# Altium PCB C8T6.PcbDoc
Units mil, origin at the board's own origin, x right, y up, seen from the top; angles counter-clockwise.
Board outline 1420 x 1527.01 mil, 2 copper layers (Top Layer, Bottom Layer); 23 components, 22 nets, 120 pads, 26 vias.
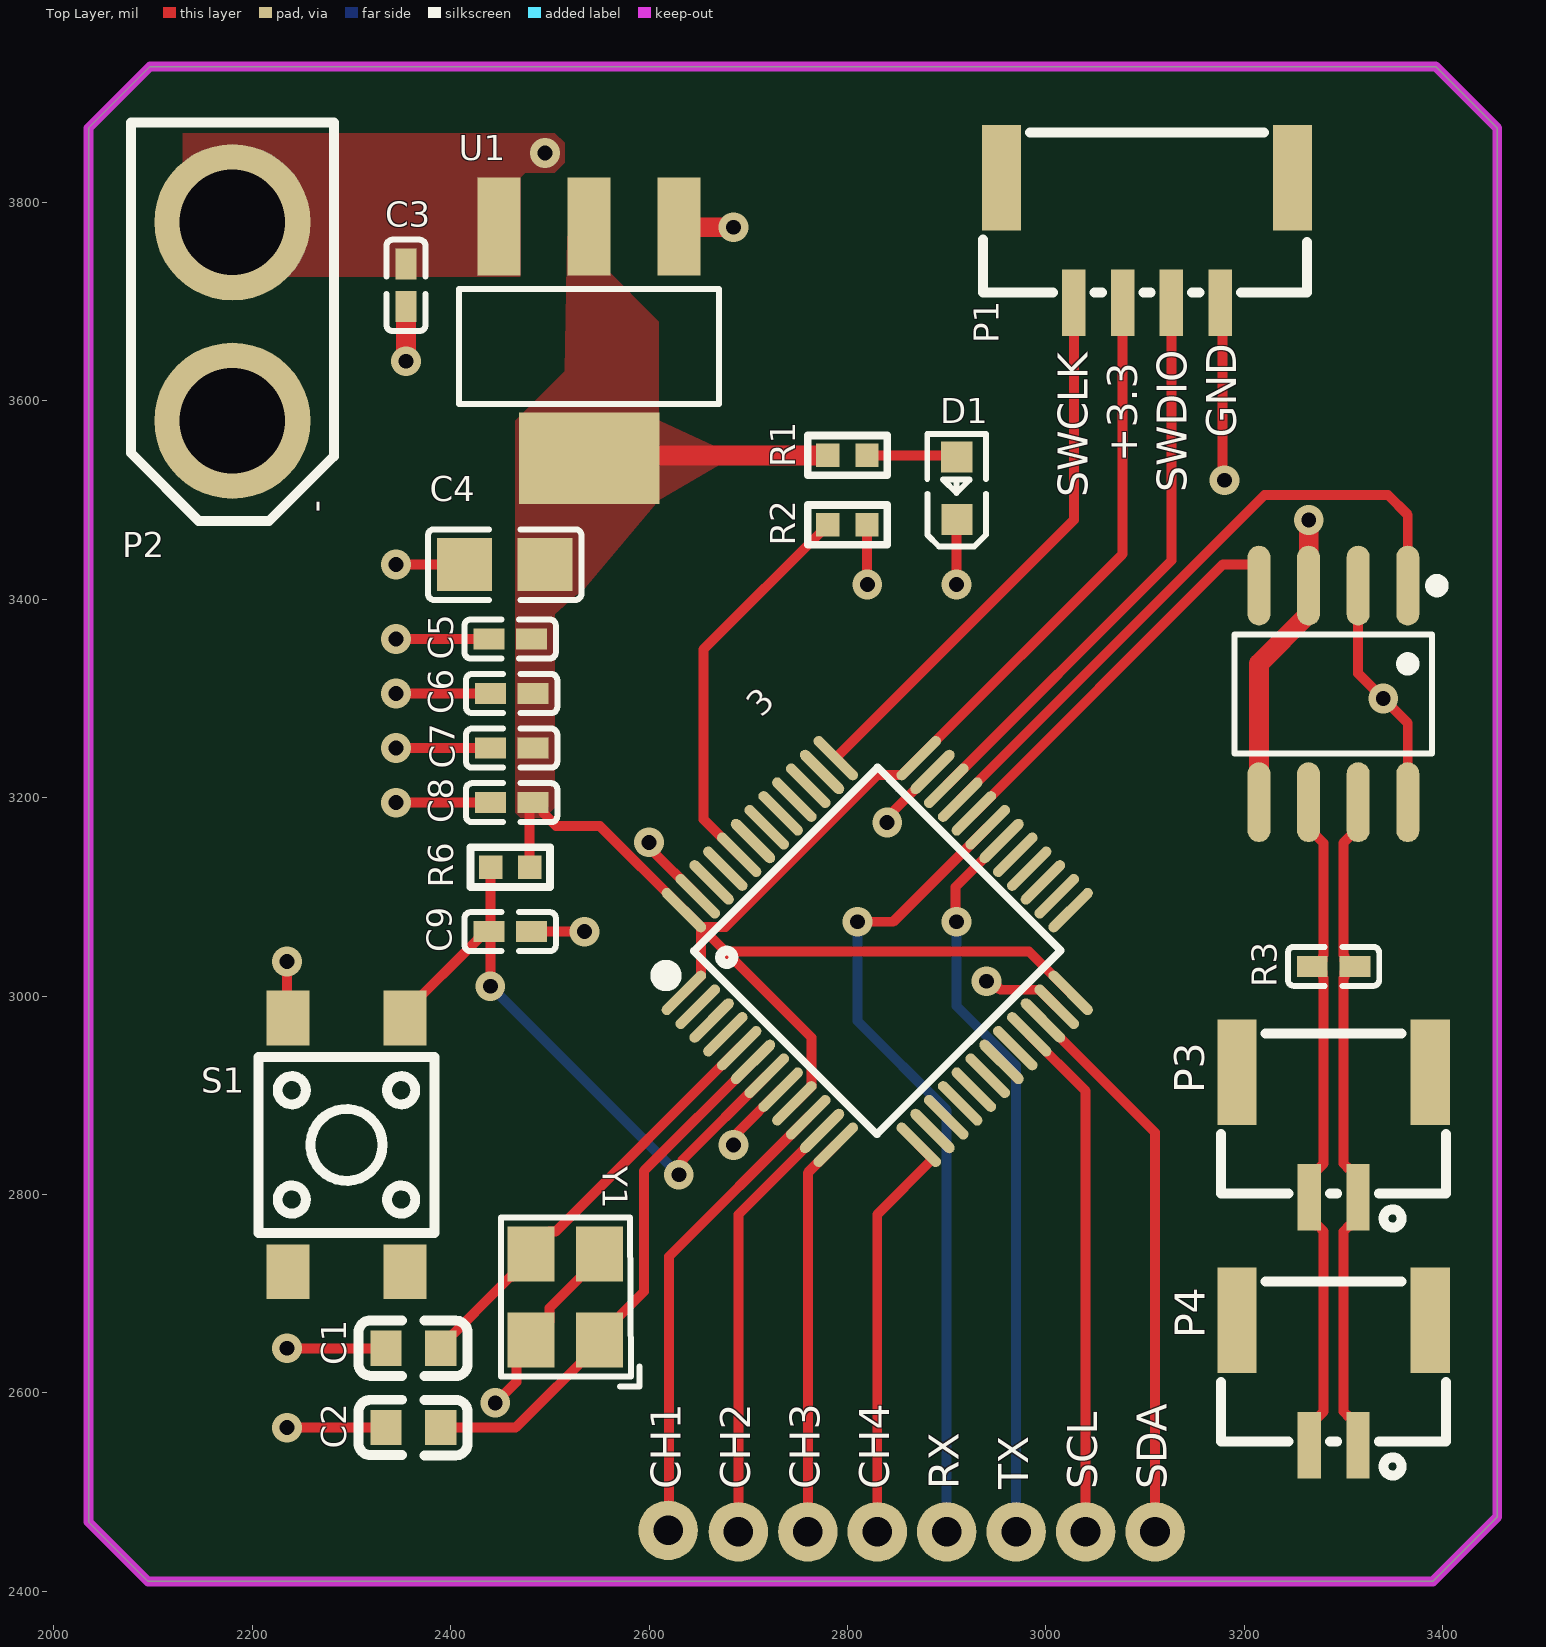
[diagram p0: Top Layer view]
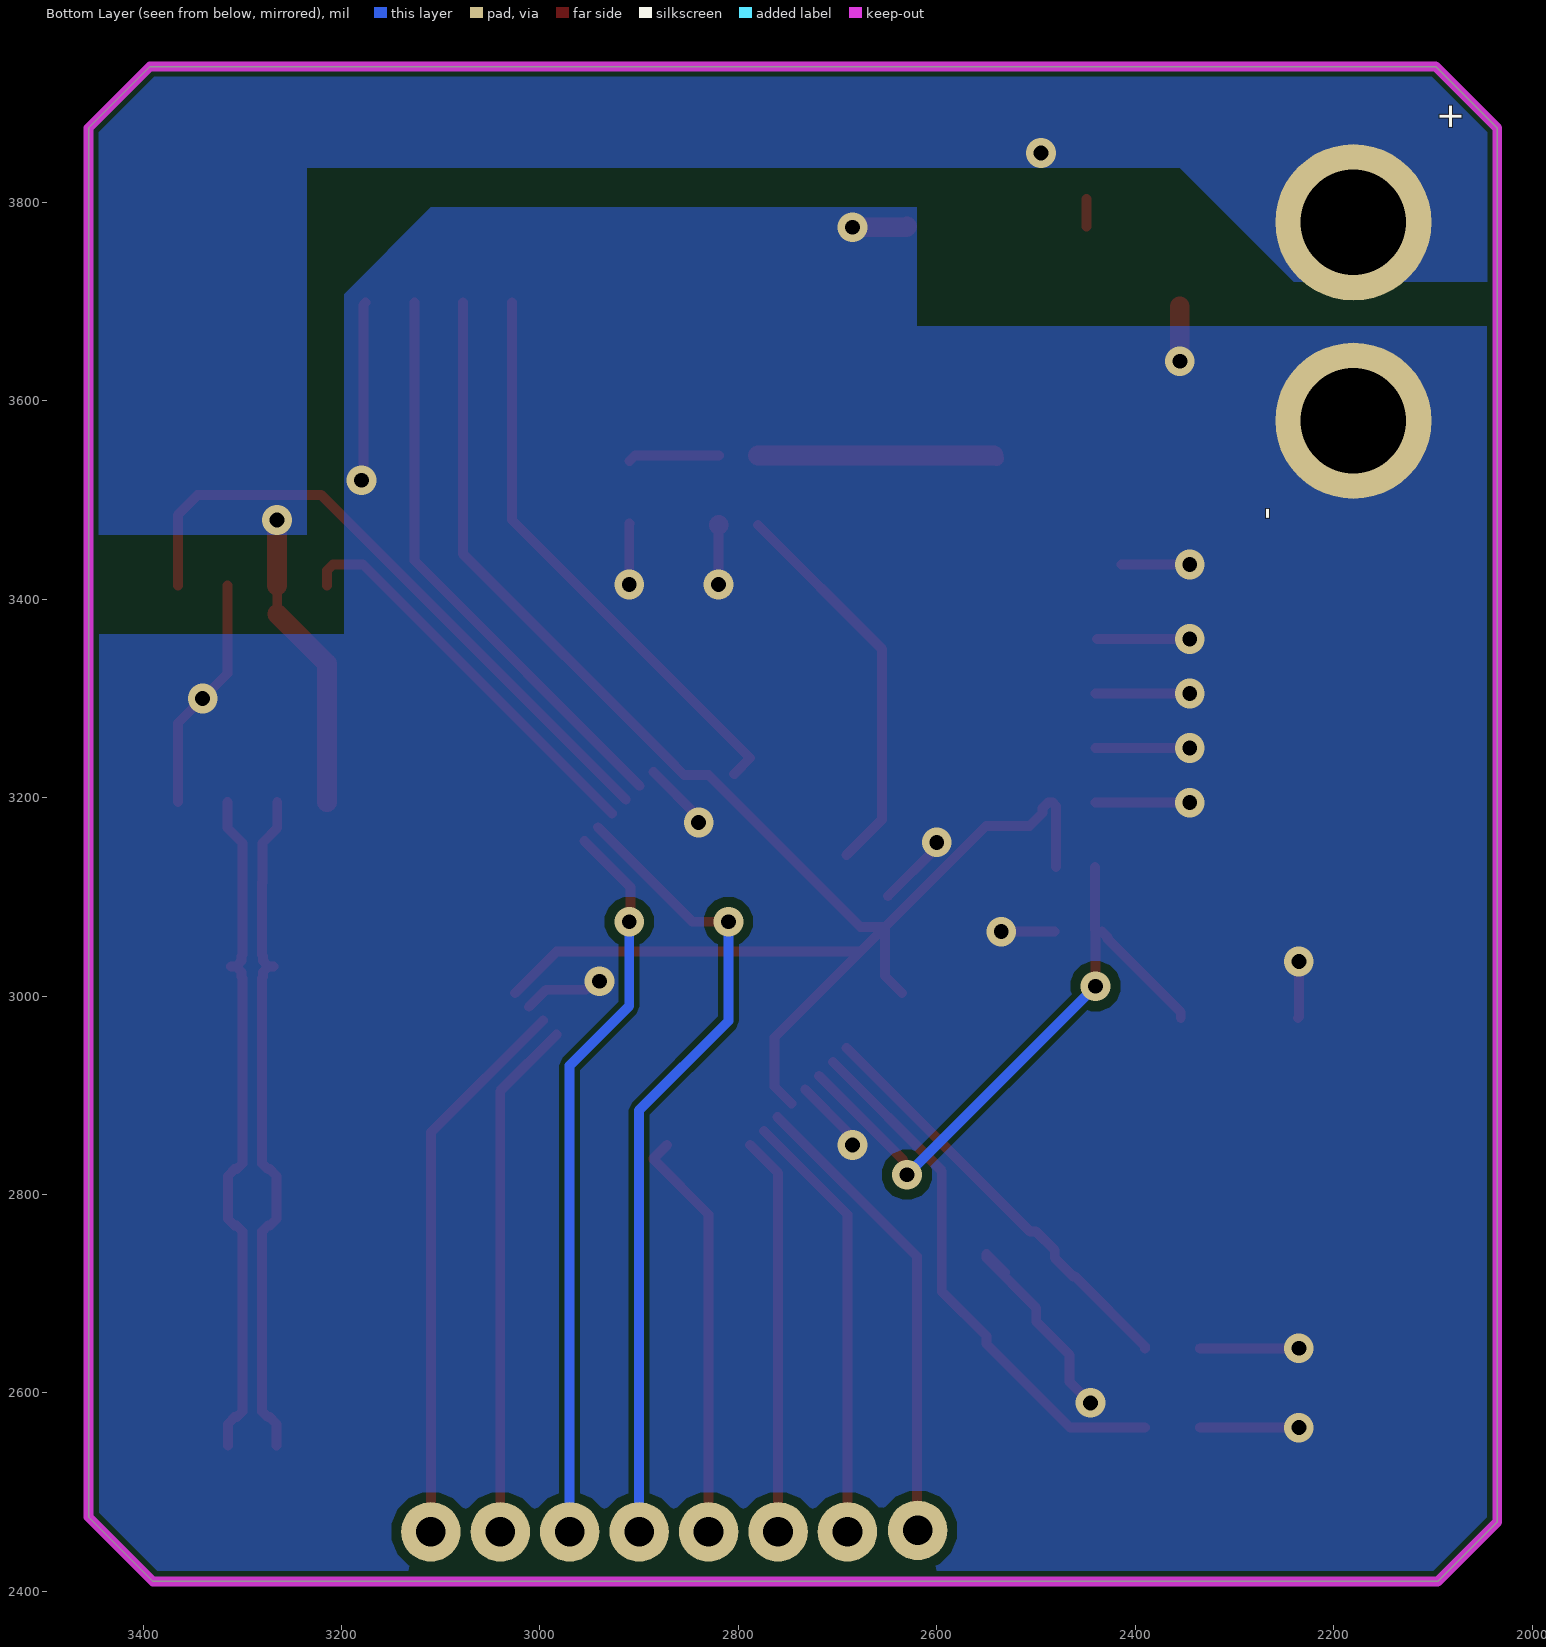
[diagram p1: Bottom Layer view, seen from below]

## Layer stack, top to bottom
Top Solder: solder mask 0.4, Solder Resist, Dk 3.5
Top Layer: signal copper 1.4
Dielectric 1: dielectric 12.6, FR-4, Dk 4.8
Bottom Layer: signal copper 1.4
Bottom Solder: solder mask 0.4, Solder Resist, Dk 3.5

## Board outline
2095,2410 2035,2470 2035,3875 2097.01,3937.01 3392.99,3937.01 3455,3875 3455,2475 3390,2410

## Design rules (kind name [scope] priority, off if disabled: settings)
Clearance [All] p1: gap=5 ignorepadtopadclearanceinfootprint=TRUE except(2: Arc-Arc Arc-Track Arc-SMDPad Arc-THPad Arc-Via Arc-Text Arc-Hole Track-Track Track-SMDPad Track-THPad Track-Via Track-Text Track-Hole; 8: Fill-Fill Fill-Poly Fill-Region Fill-Text Fill-Hole Poly-Poly Poly-Region Poly-Text Poly-Hole Region-Region Region-Text Region-Hole; 10: SMDPad-Fill SMDPad-Poly SMDPad-Region THPad-Fill THPad-Poly THPad-Region Via-Fill Via-Poly Via-Region)
DiffPairsRouting [All] p1: maxlimit=10 minlimit=5 mostfreqgap=10 toplayer_minwidth=5 toplayer_maxwidth=15 toplayer_prefwidth=15 bottomlayer_minwidth=5 bottomlayer_maxwidth=15 bottomlayer_prefwidth=15 maxuncoupledlength=500
PlaneClearance [All] p1: clearance=50
PlaneConnect [All] p1: planeconnectstyle=Direct reliefexpansion=20 reliefentries=4 reliefconductorwidth=10 reliefairgap=10
PolygonConnect [All] p1: connectstyle=Direct reliefconductorwidth=10 reliefentries=4 polygonreliefangle="90 Angle" airgapwidth=10
RoutingVias [All] p1: holewidth=15 width=30 viastyle="Through Hole" minholewidth=10 minwidth=20 maxholewidth=30 maxwidth=50
SolderMaskExpansion [All] p1: expansion=4 istentingtop=FALSE
UnRoutedNet [All] p1: checkbadconnections=TRUE
Width [All] p1: maxlimit=50 minlimit=5 preferedwidth=10 minimp=50.000000 maximp=50.000000 favimp=50.000000
26 further rules are at their usual default settings.

## Classes and differential pairs
component class C8T6: C1 C2 C3 C4 C5 C6 C7 C8 C9 D1 P1 P2 P3 P4 R1 R2 R3 R6 S1 U1 Y1
differential pair CAN: +CAN_P -CAN_N

## Components (designator, comment, footprint, x,y, rotation, side; value= is the part's Value field where it differs from the comment)
3 "STM32F103C8T6" STM32F103C8T6 2830,3045 r45 top (schematic designator *)
* "SN65HVD1050" SN65HVD230DR 3295,3305 r180 top
C1 "20pF" CAP0603 2362.11,2644.71 r0 top
C2 "20pF" CAP0603 2362.11,2564.71 r0 top
C3 "10uf" cap0402 2355,3716.46 r90 top
C4 "10uf" cap0805 2457.1,3435 r0 top
C5 "4.7uf" cap0402 2460,3360 r0 top
C6 "0.1uf" cap0402 2461.46,3305 r0 top
C7 "0.1uf" cap0402 2461.46,3250 r0 top
C8 "0.1uf" cap0402 2461.46,3195 r0 top
C9 "0.1uf" cap0402 2460,3065 r0 top
D1 "LED0" LED-0603 2910,3510 r90 top
P1 "LINK" GH1.25-49 3095,3775 r180 top
P2 "Header 2" XT30-M 2180,3680 r270 top
P3 "Header 2" CONN-SMD_GH1.25-2PWBPZ 3290,2870 r180 top
P4 "Header 2" CONN-SMD_GH1.25-2PWBPZ 3290,2620 r180 top
R1 "2K" res0402 2800,3545 r0 top
R2 "10K" res0402 2800,3475 r0 top
R3 "120Ω" cap0402 3290,3030 r180 top
R6 "10K" res0402 2460,3130 r180 top
S1 "SW-PB" SW-SMD_4P-L4.5-W4.5-P3.00-LS6.8 2300,2900 r270 top
U1 "LDO" SOT-223-3_L6.5-W3.4-P2.30-LS7.0-BR 2540,3655 r90 top
Y1 "XTAL" OSC-SMD_4P-L3.2-W2.5-BL 2510.55,2701.7 r90 top

## Footprints (in the part's own frame and the unit in brackets; to place one, negate y for a bottom-side part, rotate by r counter-clockwise, add the part's x,y. Pads: shape width x height; smd on the part's side, far side on the other; paste and mask are expansions set on the pad)
cap0402 [mm]
  rect 0.79x0.54 smd: 1(-0.545,0) 2(0.545,0)
  silkscreen extent -1.17,-0.5 1.17,0.5
CAP0603 [mm]
  rect 0.8x0.9 smd: 1(-0.691,0.007) 2(0.708,0.007)
  silkscreen extent -1.4,-0.7 1.4,0.72
cap0805 [mm]
  rect 1.41x1.35 smd: 1(-1.097,0) 2(0.963,0)
  silkscreen extent -2.03,-0.9 1.9,0.9
CONN-SMD_GH1.25-2PWBPZ [mm]
  rect 0.6x1.7 smd paste+0 mask+0.051: 1(-0.625,1.852) 2(0.625,1.852)
  rect 1x2.7 smd paste+0 mask+0.051: 3(2.475,-1.352) 4(-2.475,-1.348)
  silkscreen extent -2.88,-2.35 2.88,2.62
GH1.25-49 [mm]
  rect 0.6x1.7 smd paste+0 mask+0.05: 1(-2.052,1.931) 2(-0.802,1.931) 3(0.448,1.931) 4(1.698,1.931)
  rect 1x2.7 smd paste+0 mask+0.05: 5(-3.902,-1.269) 6(3.548,-1.269)
  silkscreen extent -4.28,-2.43 4.02,1.67
LED-0603 [mm]
  rect 0.8x0.8 smd paste+0 mask+0.051: 1(-0.75,-0.009) 2(0.849,-0.002)
  silkscreen extent -1.44,-0.75 1.44,0.75
OSC-SMD_4P-L3.2-W2.5-BL [mm]
  rect 1.4x1.2 smd paste+0 mask+0.051: 1(-1.227,-1.002) 2(0.973,-1.002) 3(0.973,0.748) 4(-1.227,0.748)
  silkscreen extent -2.41,-2.03 1.9,1.52
res0402 [mm]
  rect 0.6x0.6 smd: 1(-0.5,0) 2(0.5,0)
  silkscreen extent -1.02,-0.51 1.02,0.51
SN65HVD230DR [mm]
  oval 0.588x2.045 smd: 1(-1.773,-2.764) 2(-0.503,-2.764) 3(0.767,-2.764) 4(2.037,-2.764) 5(2.037,2.781) 6(0.767,2.781) 7(-0.503,2.781) 8(-1.773,2.781)
  silkscreen extent -2.67,-2.91 2.66,1.53
SOT-223-3_L6.5-W3.4-P2.30-LS7.0-BR [mm]
  rect 2.5x1.1 smd paste+0 mask+0.051: 1(3.07,-2.287) 2(3.07,0.013) 3(3.07,2.313)
  rect 2.34x3.6 smd paste+0 mask+0.051: 4(-2.87,0.013)
  silkscreen extent -1.47,-3.31 1.47,3.34
STM32F103C8T6 [mm]
  oval 1.5x0.27 smd: 1(-4.25,2.75) 2(-4.25,2.25) 3(-4.25,1.75) 4(-4.25,1.25) 5(-4.25,0.75) 6(-4.25,0.25) 7(-4.25,-0.25) 8(-4.25,-0.75) 9(-4.25,-1.25) 10(-4.25,-1.75) 11(-4.25,-2.25) 12(-4.25,-2.75) 25(4.25,-2.75) 26(4.25,-2.25) 27(4.25,-1.75) 28(4.25,-1.25) 29(4.25,-0.75) 30(4.25,-0.25) 31(4.25,0.25) 32(4.25,0.75) 33(4.25,1.25) 34(4.25,1.75) 35(4.25,2.25) 36(4.25,2.75)
  oval 0.27x1.5 smd: 13(-2.75,-4.25) 14(-2.25,-4.25) 15(-1.75,-4.25) 16(-1.25,-4.25) 17(-0.75,-4.25) 18(-0.25,-4.25) 19(0.25,-4.25) 20(0.75,-4.25) 21(1.25,-4.25) 22(1.75,-4.25) 23(2.25,-4.25) 24(2.75,-4.25) 37(2.75,4.25) 38(2.25,4.25) 39(1.75,4.25) 40(1.25,4.25) 41(0.75,4.25) 42(0.25,4.25) 43(-0.25,4.25) 44(-0.75,4.25) 45(-1.25,4.25) 46(-1.75,4.25) 47(-2.25,4.25) 48(-2.75,4.25)
  silkscreen extent -4.46,-3.3 3.34,3.59
SW-SMD_4P-L4.5-W4.5-P3.00-LS6.8 [mm]
  rect 1.4x1.1 smd paste+0 mask+0.051: 1(-1.98,1.373) 2(4.52,1.373) 3(-1.98,-1.627) 4(4.52,-1.627)
  silkscreen extent -0.98,-2.38 3.52,2.12
XT30-M [mm]
  round 4 hole 2.7: 1(-2.54,0) 2(2.54,0)
  silkscreen extent -5.1,-2.6 5.11,2.6, body extent -5.1,-2.8 5.1,2.8, height 10.66

## Part data
*: library part SN65HVD230DR
C1 C2 C3: library part Cap, "0603", LatestRevisionDate=17-Jul-2002, LatestRevisionNote="Re-released for DXP Platform.", PackageDescription="Radial Cap, Thru-Hole; 2 Leads; 0.3 in Pin Spacing", PackageReference=RAD-0.3, Published=8-Jun-2000, Publisher="Altium Limited"
C4: library part Cap, "钽电容", LatestRevisionDate=17-Jul-2002, LatestRevisionNote="Re-released for DXP Platform.", PackageDescription="Radial Cap, Thru-Hole; 2 Leads; 0.3 in Pin Spacing", PackageReference=RAD-0.3, Published=8-Jun-2000, Publisher="Altium Limited"
C5 C6 C7 C8 C9: library part Cap, "0402", LatestRevisionDate=17-Jul-2002, LatestRevisionNote="Re-released for DXP Platform.", PackageDescription="Radial Cap, Thru-Hole; 2 Leads; 0.3 in Pin Spacing", PackageReference=RAD-0.3, Published=8-Jun-2000, Publisher="Altium Limited"
D1: "Typical INFRARED GaAs LED", LatestRevisionDate=08-Jul-2005, LatestRevisionNote="Mech Layer 1 removed.", PackageDescription="LED; 2 Leads", PackageReference=LED-0, Published=8-Jun-2000, Publisher="Altium Limited"
P1: library part "Header 4", "Header, 4-Pin", LatestRevisionDate=17-Jul-2002, LatestRevisionNote="Re-released for DXP Platform.", Publisher="Altium Limited"
P2 P3 P4: "Header, 2-Pin", LatestRevisionDate=17-Jul-2002, LatestRevisionNote="Re-released for DXP Platform.", Publisher="Altium Limited"
R1 R2 R6: library part Res2, "0402", LatestRevisionDate=17-Jul-2002, LatestRevisionNote="Re-released for DXP Platform.", PackageDescription="Axial Device, Thru-Hole; 2 Leads; 0.4 in Pin Spacing", PackageReference=AXIAL-0.4, Published=8-Jun-2000, Publisher="Altium Limited"
R3: library part Res1, "0402", LatestRevisionDate=17-Jul-2002, LatestRevisionNote="Re-released for DXP Platform.", PackageDescription="Axial Device, Thru-Hole; 2 Leads; 0.3 in Pin Spacing", PackageReference=AXIAL-0.3, Published=8-Jun-2000, Publisher="Altium Limited"
S1: "Switch", LatestRevisionDate=17-Jul-2002, LatestRevisionNote="Re-released for DXP Platform.", PackageDescription="Switch; 2 Leads", PackageReference=SPST-2, Published=24-Mar-1999, Publisher="Altium Limited"
U1: library part LM1117S-3.3, "SOT-223"
Y1: "ECS-240-12-33Q-JES-TR", LatestRevisionDate=17-Jul-2002, LatestRevisionNote="Re-released for DXP Platform.", PackageDescription="Crystal, Thru-Hole; 2 Leads; Body 3.1 x 8.2 mm (Dia.xH)", PackageReference=R38, Published=8-Jun-2000, Publisher="Altium Limited"

## Free pads (board coordinates)
  round 60 hole 30: 8(2690,2460) 9(2760,2460) 11(2830,2460) 13(2619.23,2461.49) 14(2900,2460) 15(2970,2460) 16(3040,2460) 17(3110,2460)

## Via types
v1: diameter 30, hole 15, Top Layer to Bottom Layer, 26 vias

## Nets (pads, with @x,y where several pads share a name; then routed paths per layer and width w, separated by ;. In a path a pad name is that pad's centre, name@x,y a point inside that pad or via, vN(x,y) a via of type N, cw(c..) or ccw(c..) an arc to the next point about the centre after c; other vN are vias at no path point)
+3.3: 3.1 3.9 3.24 3.36 3.48 C4.2 C5.2 C6.2 C7.2 C8.2 P1.3 R1.1 R6.1 U1.2 U1.4 | length 2036.7
  Top Layer w10: R6.1 2479.68,3191.76 C8.2 2487.84,3195 2493.47,3189.37 2493.47,3184.45 2506.36,3171.56 2550.33,3171.56 3.48 3.48@2652.25,3069.64 ; 3.1 2652.25,3020.37 3.48@2652.25,3069.64 ; 3.9 2763.6,2909.01 2763.6,2958.28 2676.89,3045 ; 3.24@3025.04,3003.24 3.24 2983.11,3045 2676.89,3045 ; P1.3 3077.36,3445.48 3.36 2854.63,3222.75 2830,3222.75 2676.89,3069.64 3.48@2652.25,3069.64 ; 3.48@2652.25,3069.64 2676.89,3045
  Top Layer w15: U1.4 U1.4@2542.51,3545
  Top Layer w20: U1.4@2542.51,3545 R1.1
+5: *.3 *.5 C3.2 P2.1 U1.3 | length 338.4
  Top Layer w10: U1.3 U1.3@2448.95,3803.41 ; v1@2495,3849.46 v1(2495,3850) ; *.3@3264.79,3385.12 *.3 *.3@3264.89,3413.91 ; v1@3264.89,3479.89 v1(3265,3480)
  Top Layer w20: *.5 3214.79,3335.12 *.3@3264.79,3385.12 ; *.3@3264.89,3413.91 v1@3264.89,3479.89
  Bottom Layer w10: v1(3265,3480) v1@3265,3485
CAN_N: *.6 P3.2 P4.2 R3.2 | length 686.6
  Top Layer w10: *.6 3264.79,3169.38 3279.79,3154.38 3279.79,3114.57 3280,3114.36 3280,3041.49 3279.09,3040.58 3279.09,3035.63 R3.2@3273.46,3030 ; P4.2 3265.39,2568.74 3272.2,2575.55 3274.14,2575.55 3280,2581.41 3280,2762.77 3274.14,2768.62 3272.2,2768.62 3265.39,2775.43 P3.2 3265.39,2818.74 3272.2,2825.55 3274.14,2825.55 3280,2831.41 3280,2903.54 3280,3018.51 3279.09,3019.42 3279.09,3024.37 R3.2@3273.46,3030 ; R3.2 R3.2@3273.46,3030
CAN_P: *.7 P3.1 P4.1 R3.1 | length 686.6
  Top Layer w10: R3.1 R3.1@3306.54,3030 ; P4.1 3314.61,2568.74 3307.8,2575.55 3305.86,2575.55 3300,2581.41 3300,2762.77 3305.86,2768.62 3307.8,2768.62 3314.61,2775.43 P3.1 3314.61,2818.74 3307.8,2825.55 3305.86,2825.55 3300,2831.41 3300,2911.83 3300,3018.51 3300.91,3019.42 3300.91,3024.37 R3.1@3306.54,3030 ; *.7 3314.79,3169.38 3299.79,3154.38 3299.79,3122.85 3300,3122.64 3300,3041.49 3300.91,3040.58 3300.91,3035.63 R3.1@3306.54,3030
CAN_RX: 3.32 *.4 | length 408.9
  Top Layer w10: 3.32 3178.23,3435 3208.71,3435 3214.79,3428.93 *.4
CAN_TX: 3.33 *.1 | length 658
  Top Layer w10: 3.33 3220.41,3505 3345,3505 3364.79,3485.21 *.1
GND: 3.8 3.23 3.35 3.47 *.2 *.8 C1.1 C2.1 C3.1 C4.1 C5.1 C6.1 C7.1 C8.1 C9.2 D1.1 P1.1 P2.2 R2.2 S1.3 U1.1 Y1.2 Y1.4 | length 1931.4
  Top Layer w10: v1(2235,2565) C2.1 ; v1(2235,2645) C1.1 ; v1(2235,3035) 2235,2978.9 S1.3 ; v1(2345,3195) C8.1 ; v1(2345,3250) C7.1 ; v1(2345,3305) C6.1 ; v1(2345,3360) C5.1 ; v1(2345,3435) C4.1 ; v1(2445,2590) 2466.21,2611.21 2466.21,2638.5 Y1.4 2499.73,2672.01 2499.73,2685.79 2550,2736.06 Y1.2 Y1.2@2531.38,2721.38 ; C9.2 v1(2535,3065) ; v1(2600,3155) 2600,3149.9 2649.05,3100.85 3.47 ; v1(2685,2850) 2688.83,2853.83 2688.83,2862.06 3.8 ; v1@2819.84,3415.16 R2.2@2819.84,3474.84 ; v1(2840,3175) 2840,3180.1 2885.68,3225.77 3.35 ; D1.1@2909.93,3476.57 2910,3476.5 v1(2910,3415) ; v1(2940,3015) 2945.41,3015 2953.97,3006.44 2993.83,3006.44 3.23 ; P1.1 3177.89,3696.87 3177.89,3522.11 v1(3180,3520) ; *.2 3314.79,3325.21 v1(3340,3300) 3364.79,3275.21 *.8
  Top Layer w20: v1(2355,3640) C3.1 ; U1.1 2630.9,3775 v1(2685,3775) ; R2.2 R2.2@2819.84,3474.84 ; v1@2819.84,3415.16 v1(2820,3415)
Net*_44: 3.44 R2.1 | length 399.3
  Top Layer w10: 3.44 2655,3178.24 2655,3349.68 R2.1
NetD1_1: D1.2 R1.2 | length 92.2
  Top Layer w10: R1.2 2904.18,3545 D1.2@2909.65,3539.52
NRST: 3.7 C9.1 R6.2 S1.1 | length 645.3
  Top Layer w10: S1.1 2354.06,2983.86 2427.99,3057.79 2427.99,3059.37 C9.1@2433.62,3065 ; v1(2440,3010) 2440,3066.46 2440.31,3066.77 R6.2 ; v1(2630,2820) 2633.83,2823.83 2633.83,2834.92 3.7
  Bottom Layer w10: v1(2440,3010) v1(2630,2820)
PD0-OSCIN: 3.5 C1.2 Y1.3 | length 431.9
  Top Layer w10: C1.2 2390,2646.97 2460.47,2717.44 2462.48,2717.44 2481.1,2736.06 Y1.3 2481.1,2743.93 2499.73,2762.56 2505.79,2762.56 3.5
PD1-OSCOUT: 3.6 C2.2 Y1.1 | length 543.3
  Top Layer w10: C2.2 2465.55,2565 2550,2649.45 Y1.1 2550,2657.32 2595,2702.32 2595,2823.91 3.6
SCL: 3.21 pad.16 | length 513.9
  Top Layer w10: 3.21 3040,2904.59 pad.16@3040,2471.19
SDA: 3.22 pad.17 | length 542.3
  Top Layer w10: 3.22 3110,2862.44 pad.17@3110,2479.92
SWCLK: 3.37 P1.4 | length 581.3
  Top Layer w10: 3.37@2804.5,3224.03 2804.09,3224.03 3.37 3028.15,3479.78 P1.4
SWDIO: 3.34 P1.2 | length 581
  Top Layer w10: 3.34 3126.57,3439.02 P1.2
TIM2_CH1: 3.10 pad.13 | length 471.1
  Top Layer w10: pad.13@2620,2465 2620,2737.56 3.10
TIM2_CH2: 3.11 pad.8 | length 452.2
  Top Layer w10: pad.8@2690,2446.76 2690,2779.73 3.11
TIM2_CH3: 3.12 pad.9 | length 419.7
  Top Layer w10: pad.9@2760,2442.12 2760,2821.88 3.12
TIM2_CH4: 3.13 pad.11 | length 429.5
  Top Layer w10: pad.11@2830,2449.47 2830,2780 2885.73,2835.73 2885.73,2836.14 3.13
USART1_RX: 3.31 pad.14 | length 825.8
  Top Layer w10: v1(2810,3075) 2846.09,3075 3.31
  Bottom Layer w10: v1(2810,3075) 2810,2975 2900,2885 pad.14@2900,2457.26
USART1_TX: 3.30 pad.15 | length 735.1
  Top Layer w10: v1(2910,3075) 2908.91,3076.09 2908.91,3110 3.30
  Bottom Layer w10: v1(2910,3075) 2910,2990 2970,2930 pad.15@2970,2465.78
pads on no net: 3.2 3.3 3.4 3.14 3.15 3.16 3.17 3.18 3.19 3.20 3.25 3.26 3.27 3.28 3.29 3.38 3.39 3.40 3.41 3.42 3.43 3.45 3.46 P1.5 P1.6 P3.3 P3.4 P4.3 P4.4 S1.2 S1.4

## Polygon pours and split planes (outlines as drawn)
+3.3 on Top Layer "+3.3_L01_P003" (solid, remove dead copper, pour order 3): 2505,3385 2539.15,3415.66 2465,3414.41 2465,3185 2470,3180 2495,3180 2505,3190
+3.3 on Top Layer "+3.3_L01_P002" (solid, remove dead copper, pour order 2): 2600,3585 2665,3555 2670,3555 2670,3535 2610,3500 2600,3500
+3.3 on Top Layer "+3.3_L01_P001" (solid, remove dead copper, pour order 1): 2517.5,3772.5 2515,3630 2465,3580 2465,3405 2530,3405 2610,3500 2610,3680 2553.33,3736.67
+5 on Top Layer "+5_L01_P000" (solid, remove dead copper, pour order 0): 2470,3825 2475,3830 2505,3830 2515,3840 2515,3860 2505,3870 2130,3870 2130,3725 2470,3725
GND on Bottom Layer "GND_L02_P008" (solid, remove dead copper, pour order 8): 1982.5,2380 2007.5,2355 3540,2355 3540,3365 3197.5,3365 3197.5,3707.5 3110,3795 2620,3795 2620,3675 2007.5,3675
+5 on Bottom Layer "+5_L02_P007" (solid, remove dead copper, pour order 7): 2000,3700 2020,3720 2240,3720 2355,3835 3235,3835 3235,3465 3470,3465 3480,3475 3480,3980 2085,3980 2000,3885

## Keep-outs
Keep-Out Layer:
  the board outline again, w10

## Silkscreen, mask and mechanical layers (free items; w line width, h text height)
Top Overlay:
  text "GND" at 3192,3563 h30 r90
  text "+3.3" at 3092,3538 h30 r90
  text "SWDIO" at 3142,3508 h30 r90
  text "SWCLK" at 3042,3503 h30 r90
  text "CH1" at 2632,2503 h30 r90
  text "CH2" at 2702,2503 h30 r90
  text "CH3" at 2772,2503 h30 r90
  text "CH4" at 2842,2503 h30 r90
  text "RX" at 2912,2503 h30 r90
  text "TX" at 2982,2503 h30 r90
  text "SCL" at 3052,2503 h30 r90
  text "SDA" at 3122,2503 h30 r90

## Text inside footprints (layer, text, board x,y; h text height)
P2: Top Overlay "-" at 2257,3500 h25 r270; Bottom Overlay "+" at 2070.76,3872.11 h25 r270; Bottom Overlay "-" at 2257,3480 h25 r270